# Altium PCB MainBoard_V2.PcbDoc
Units mil, origin at the board's own origin, x right, y up, seen from the top; angles counter-clockwise.
Board outline 3937.01 x 5118.11 mil, 2 copper layers (Top Layer, Bottom Layer); 82 components, 86 nets, 392 pads, 30 vias.
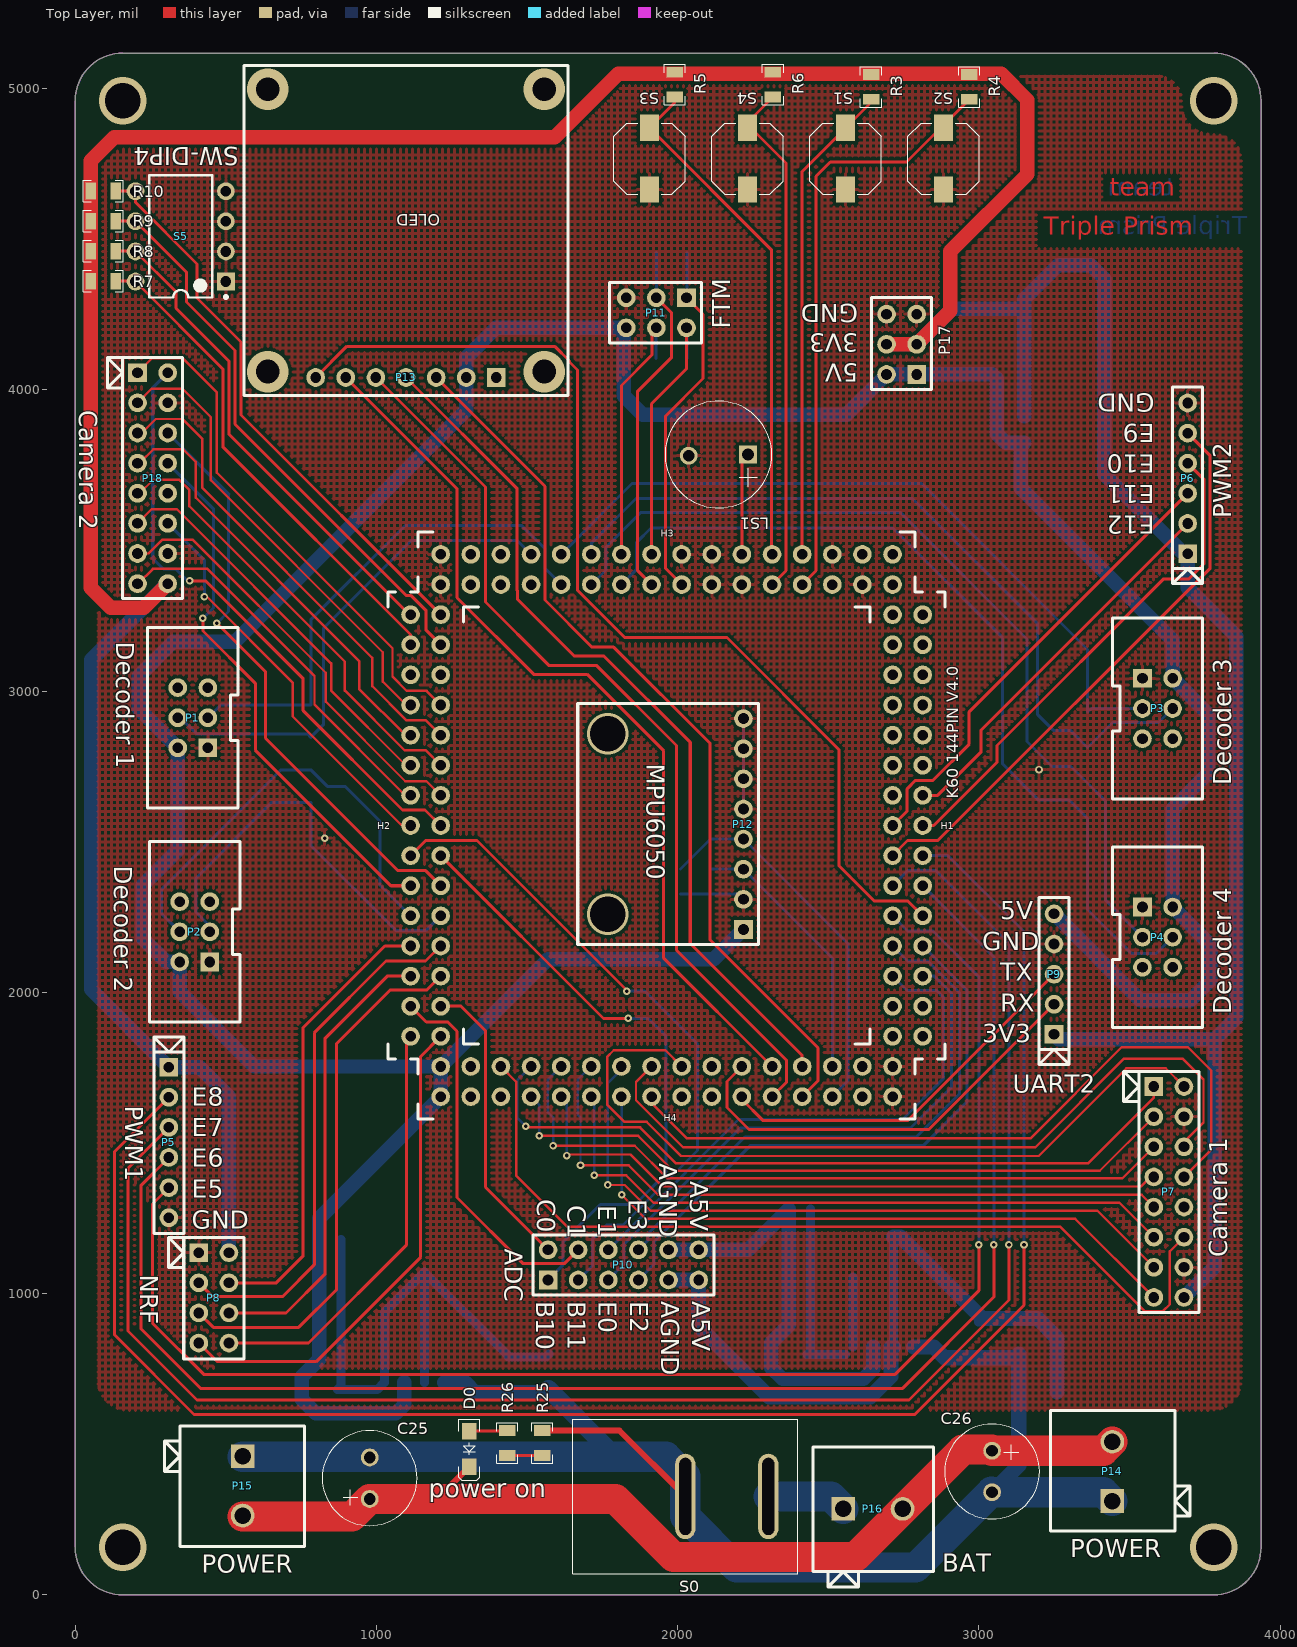
[diagram p0: Top Layer view]
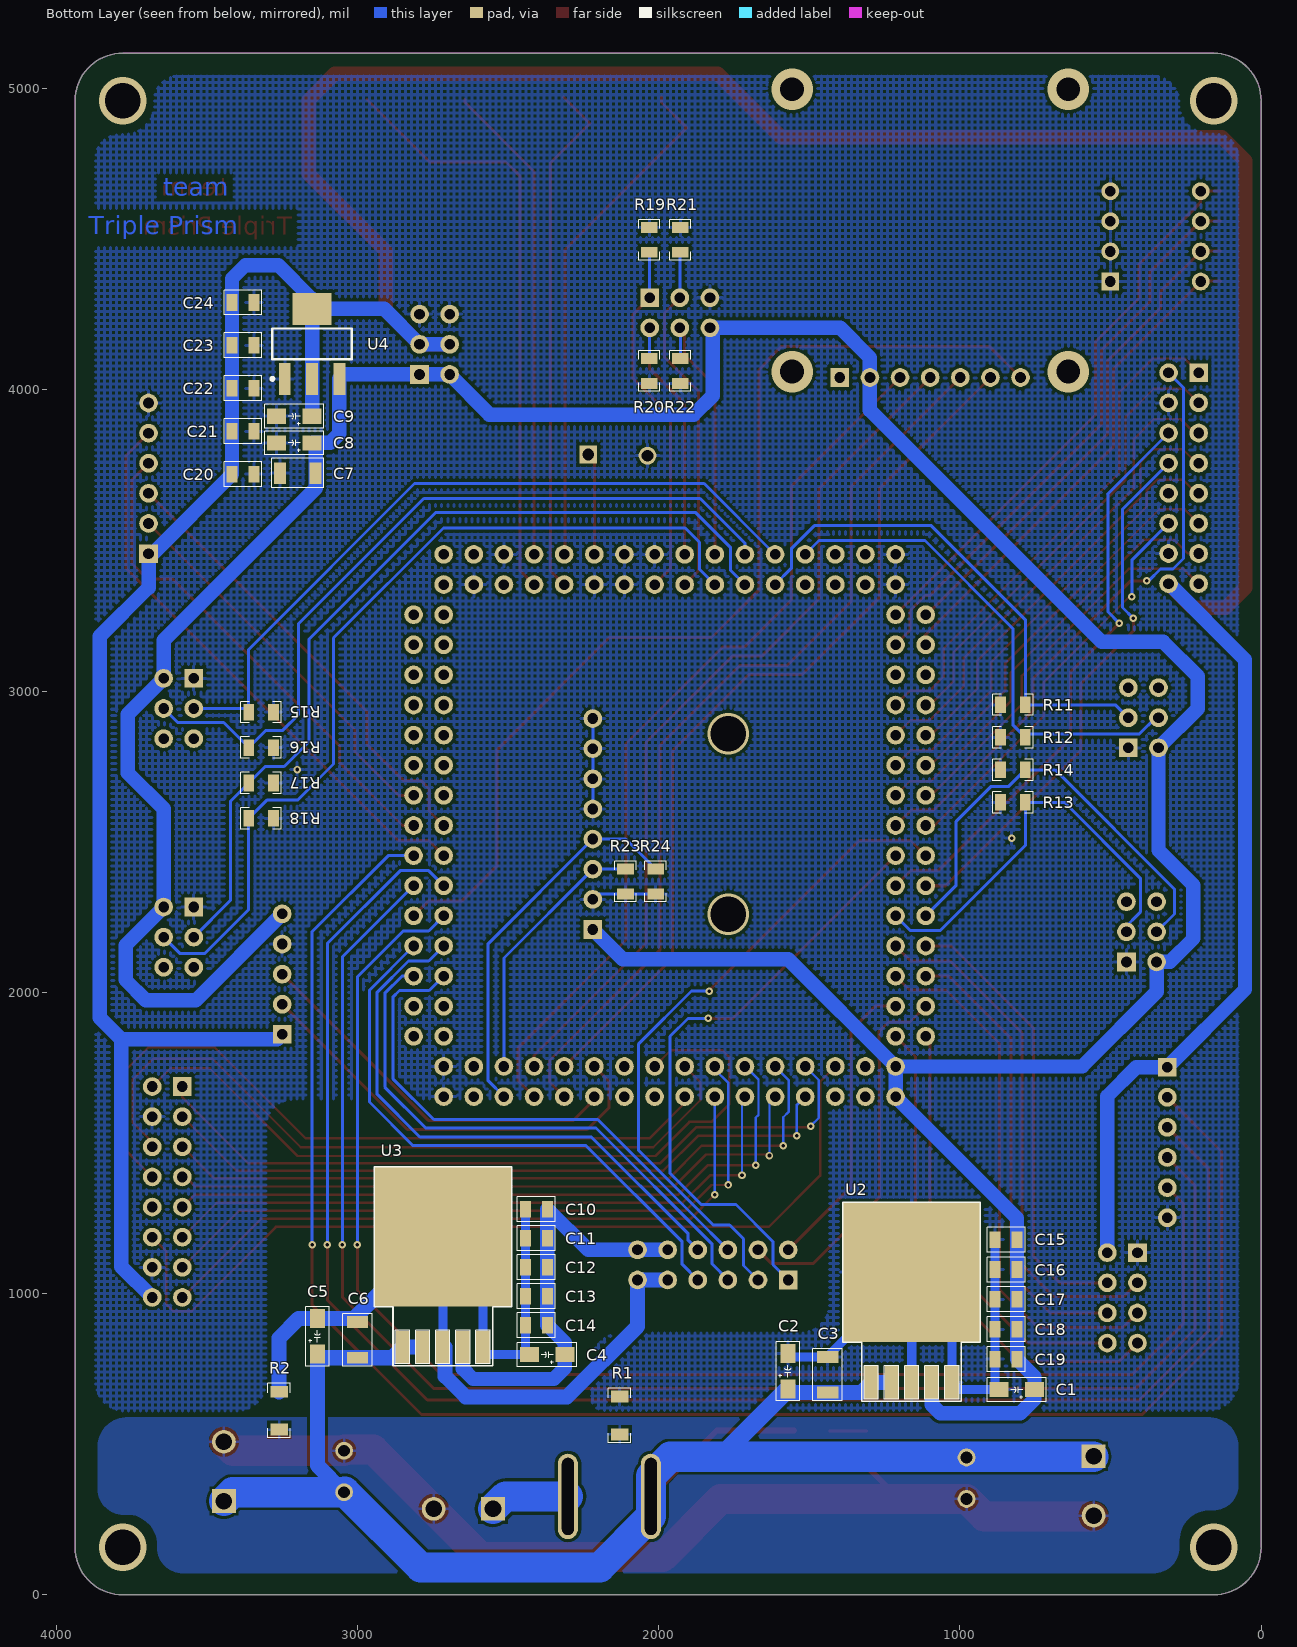
[diagram p1: Bottom Layer view, seen from below]

## Layer stack, top to bottom
Top Solder: solder mask 0.4, Solder Resist, Dk 3.5
Top Layer: signal copper 1.4
Dielectric 1: dielectric 12.6, FR-4, Dk 4.8
Bottom Layer: signal copper 1.4
Bottom Solder: solder mask 0.4, Solder Resist, Dk 3.5

## Board outline
157.48,0 cw(c157.48,157.48) 0,157.48 0,4960.63 cw(c157.48,4960.63) 157.48,5118.11 3779.53,5118.11 cw(c3779.53,4960.63) 3937.01,4960.63 3937.01,157.48 cw(c3779.53,157.48) 3779.53,0

## Design rules (kind name [scope] priority, off if disabled: settings)
Clearance [All] p1: gap=10
PolygonConnect [All] p1: connectstyle=Relief reliefconductorwidth=10 reliefentries=4 polygonreliefangle="90 Angle" airgapwidth=10
RoutingVias [All] p1: holewidth=28 width=50 viastyle="Through Hole" minholewidth=28 minwidth=50 maxholewidth=28 maxwidth=50
SolderMaskExpansion [All] p1: expansion=4
Width GDN [InNetClass('GND')] p1: maxlimit=100 minlimit=10 preferedwidth=48
Width Signal [InNetClass('Signal Nets')] p2: maxlimit=10 minlimit=6 preferedwidth=10
Width "Large Power Nets" [InNetClass('Large Power Nets')] p3: maxlimit=100 minlimit=20 preferedwidth=60
Width Power [InNetClass('Power')] p4: maxlimit=60 minlimit=20 preferedwidth=50
Width [All] p5: maxlimit=10 minlimit=10 preferedwidth=10
30 further rules are at their usual default settings.

## Classes and differential pairs
net class "Signal Nets": PTA4 PTA5 PTA6 PTA7 PTA8 PTA9 PTA10 PTA11 PTA12 PTA13 PTA24 PTA25 PTA26 PTA27 PTB0 PTB1 PTB2 PTB3 PTB4 PTB5 PTB6 PTB7 PTB8 PTB9 PTB10 PTB11 PTB16 PTB17 PTB18 PTB19 PTB20 PTB21 PTB22 PTB23 PTC0 PTC1 PTC2 PTC3 PTC6 PTC8 PTC9 PTC10 PTC11 PTC12 PTC13 PTC14 PTC15 PTC16 PTC17 PTC18 PTD2 PTD3 PTD4 PTD5 PTD6 PTD7 PTD8 PTD9 PTE0 PTE1 PTE2 PTE3 PTE4 PTE5 PTE6 PTE7 PTE8 PTE9 PTE10 PTE11 PTE12 PTE24 PTE25 PTE26 PTE27 PTE28
net class "Large Power Nets": 7V2 NetP16_1
net class Power: 3V3 5V A5V
net class GND: AGND GND PGND

## Components (designator, comment, footprint, x,y, rotation, side; value= is the part's Value field where it differs from the comment)
C1 "Cap Pol1" "1206 C tan" 811.24,681.1 r0 bottom
C2 "Cap Pol1" "1206 C tan" 1570.87,742.13 r90 bottom
C3 "Cap Semi" "1206 C" 1438.98,730.32 r270 bottom
C4 "Cap Pol1" "1206 C tan" 2370.08,797.24 r0 bottom
C5 "Cap Pol1" "1206 C tan" 3132.65,858.02 r90 bottom
C6 "Cap Semi" "1206 C" 2999.55,846.21 r270 bottom
C7 "Cap Semi" "1206 C" 3197.78,3723.79 r180 bottom
C8 "Cap Pol1" "1206 C tan" 3209.59,3824.18 r0 bottom
C9 "Cap Pol1" "1206 C tan" 3209.59,3912.77 r0 bottom
C10 "Cap" "0805 C" 2405.51,1280.27 r180 bottom
C11 "Cap" "0805 C" 2405.51,1184.05 r180 bottom
C12 "Cap" "0805 C" 2405.51,1087.84 r180 bottom
C13 "Cap" "0805 C" 2405.51,991.63 r180 bottom
C14 "Cap" "0805 C" 2405.51,895.42 r180 bottom
C15 "Cap" "0805 C" 846.67,1179.13 r180 bottom
C16 "Cap" "0805 C" 846.67,1079.92 r180 bottom
C17 "Cap" "0805 C" 846.67,980.71 r180 bottom
C18 "Cap" "0805 C" 846.67,881.5 r180 bottom
C19 "Cap" "0805 C" 846.67,782.28 r180 bottom
C20 "Cap" "0805 C" 3379.86,3720.25 r0 bottom
C21 "Cap" "0805 C" 3379.86,3862.77 r0 bottom
C22 "Cap" "0805 C" 3379.86,4005.29 r0 bottom
C23 "Cap" "0805 C" 3379.86,4147.81 r0 bottom
C24 "Cap" "0805 C" 3379.86,4290.33 r0 bottom
C25 "Cap Pol1" "C POL" 977.84,387.2 r90 top
C26 "Cap Pol1" "C POL" 3044.02,409.58 r270 top
D0 "LED" "0805 D" 1308.14,484.48 r270 top
"K60 144PIN V4.0" "U1" "K60 V4.0" 1968.5,2559.06 r0 top
LS1 "BEEP" BEEP 2135.36,3785.7 r180 top
P1 "Decoder 1" "BigHeader P3*2" 440.55,2811.81 r90 top
P2 "Decoder 2" "BigHeader P3*2" 446.85,2101.18 r90 top
P3 "Decoder 3" "BigHeader P3*2" 3543.31,3042.52 r270 top
P4 "Decoder 4" "BigHeader P3*2" 3543.31,2283.46 r270 top
P5 "PWM1" "Header P6" 311.22,1751.97 r270 top
P6 "PWM2" "Header P6" 3693.31,3456.69 r90 top
P7 "Camera 1" "FHeader P8*2" 3581.1,1687.4 r270 top
P8 "NRF" NRF 410.52,1136 r270 top
P9 "UART2" "Header P5" 3249.8,1860.63 r90 top
P10 "ADC" "HEADER P6*2" 1570.08,1045.28 r0 top
P11 "FTM" "HEADER P3*2" 2029.53,4306.1 r180 top
P12 "MPU6050" MPU6050 1968.5,2559.06 r90 top
P13 "OLED" "OLED P7" 1098.43,4041.34 r180 top
P14 "POWER" "CONNECT 050-2" 3443.14,311.39 r90 top
P15 "POWER" "CONNECT 050-2" 555.98,460.1 r270 top
P16 "BAT" "CONNECT 050-2" 2550,285.43 r0 top
P17 "5V_3.3V_GND" "HEADER P3*2" 2793.66,4051.48 r90 top
P18 "Camera 2" "FHeader P8*2" 207.09,4057.09 r270 top
R1 "Res2" "1206 R" 2129.2,595.64 r270 bottom
R2 "Res2" "1206 R" 3259.66,611.34 r90 bottom
R3 "Res2" "0805 R" 2642.28,5005.91 r90 top
R4 "Res2" "0805 R" 2968.18,5005.91 r90 top
R5 "Res2" "0805 R" 1990.49,5013.78 r90 top
R6 "Res2" "0805 R" 2316.38,5013.78 r90 top
R7 "Res2" "0805 R" 93.5,4361.22 r180 top
R8 "Res2" "0805 R" 93.5,4460.96 r180 top
R9 "Res2" "0805 R" 93.5,4560.7 r180 top
R10 "Res2" "0805 R" 93.5,4660.43 r180 top
R11 "Res2" "0805 R" 823.81,2954.72 r180 bottom
R12 "Res2" "0805 R" 823.81,2846.78 r180 bottom
R13 "Res2" "0805 R" 823.81,2630.91 r180 bottom
R14 "Res2" "0805 R" 823.81,2738.85 r180 bottom
R15 "Res2" "0805 R" 3319.61,2930.12 r0 bottom
R16 "Res2" "0805 R" 3319.61,2812.66 r0 bottom
R17 "Res2" "0805 R" 3319.61,2695.21 r0 bottom
R18 "Res2" "0805 R" 3319.61,2577.76 r0 bottom
R19 "Res2" "0805 R" 2031.06,4498.03 r270 bottom
R20 "Res2" "0805 R" 2031.06,4062.99 r270 bottom
R21 "Res2" "0805 R" 1927.99,4498.03 r270 bottom
R22 "Res2" "0805 R" 1927.99,4062.99 r270 bottom
R23 "Res2" "0805 R" 2110.13,2368.11 r90 bottom
R24 "Res2" "0805 R" 2009.84,2368.11 r90 bottom
R25 "Res2" "0805 R" 1550.72,504.22 r270 top
R26 "Res2" "0805 R" 1434.52,504.22 r90 top
S0 "SW-SPST" SWITCH 2025.59,326.77 r270 top
S1 "SW-PB" "Touch Switch" 2557.4,4768 r90 top
S2 "SW-PB" "Touch Switch" 2882.86,4768 r90 top
S3 "SW-PB" "Touch Switch" 1906.48,4768 r90 top
S4 "SW-PB" "Touch Switch" 2231.94,4768 r90 top
S5 "SW-DIP4" DIP-8 350.39,4509.84 r180 top
U2 "SPX29302" TO-263-5 1293.98,705.1 r180 bottom
U3 "SPX29302" TO-263-5 2850.4,822.97 r180 bottom
U4 "1117-3.3" SOT223_M 3150.53,4152.92 r0 bottom

## Footprints (in the part's own frame and the unit in brackets; to place one, negate y for a bottom-side part, rotate by r counter-clockwise, add the part's x,y. Pads: shape width x height; smd on the part's side, far side on the other; paste and mask are expansions set on the pad)
"0805 C" [mm]
  rect 0.95x1.4 smd: 1(-0.925,0) 2(0.925,0)
  silkscreen extent -1.6,-1.05 1.6,1.05, body extent -1,-0.63 1,0.63, height 0.6
"0805 D" [mm]
  rect 1.4x1.2 smd: 1(-1.5,0) 2(1.5,0)
  silkscreen extent -2.5,-0.87 2.62,0.87
"0805 R" [mm]
  rect 0.9x1.4 smd: 1(-1.05,0) 2(1.05,0)
  silkscreen extent -1.7,-0.9 1.7,0.9, body extent -1,-0.63 1,0.63, height 0.5
"1206 C" [mm]
  rect 1x1.8 smd: 1(-1.5,0) 2(1.5,0)
  silkscreen extent -2.2,-1.25 2.2,1.25, body extent -1.6,-0.8 1.6,0.8, height 0.8
"1206 C tan" [mm]
  rect 1.6x1.27 smd: 1(-1.5,0) 2(1.5,0)
  silkscreen extent -2.5,-1 2.5,1, body extent -1.6,-0.8 1.6,0.8, height 1.6
"1206 R" [mm]
  rect 1x1.5 smd: 1(-1.6,0) 2(1.6,0)
  silkscreen extent -2.3,-0.95 2.3,0.95, body extent -1.55,-0.8 1.55,0.8, height 0.55
BEEP [mm]
  rect 1.5x1.5 hole 1: 1(-2.5,0)
  round 1.5 hole 1: 2(2.5,0.1)
  silkscreen extent -4.5,-4.5 4.5,4.5, body extent -4.5,-4.5 4.5,4.5, height 6.02
"BigHeader P3*2" [mil]
  rect 62x62 hole 35.5: 1(0,0)
  round 62 hole 35.5: 2(0,100) 3(100,0) 4(100,100) 5(200,0) 6(200,100)
  silkscreen extent -200,-100 400,200, body extent -200,-103 400,203, height 354
"C POL" [mm]
  round 1.5 hole 1: 1(-1.75,0) 2(1.75,0)
  silkscreen extent -4,-4 4,4, body extent -4,-4 4,4, height 13.2
"CONNECT 050-2" [mm]
  rect 2x2 hole 1.4: 1(0,0)
  round 2 hole 1.4: 2(5,0)
  silkscreen extent -2.54,-6.57 7.62,5.2, body extent -2.42,-2.5 7.58,5.5, height 11
DIP-8 [mm] "DIP; 8 Leads; Row Spacing 7.62 mm; Pitch 2.54 mm"
  rect 1.5x1.5 hole 0.9: 1(-3.81,3.81)
  round 1.5 hole 0.9: 2(-3.81,1.27) 3(-3.81,-1.27) 4(-3.81,-3.81) 5(3.81,-3.81) 6(3.81,-1.27) 7(3.81,1.27) 8(3.81,3.81)
  silkscreen extent -3.94,-5.15 2.65,5.23, body extent -3.6,-5.15 3.6,5.15, height 5.08
"FHeader P8*2" [mil]
  rect 62x62 hole 35.5: 1(0,0)
  round 62 hole 35.5: 2(100,0) 3(200,0) 4(300,0) 5(400,0) 6(500,0) 7(600,0) 8(700,0) 9(700,100) 10(600,100) 11(500,100) 12(400,100) 13(300,100) 14(200,100) 15(100,100) 16(0,100)
  silkscreen extent -50,-100 750,150, body extent -50,-50 750,150, height 350
"HEADER P3*2" [mil]
  rect 62x62 hole 35.5: 1(0,0)
  round 62 hole 35.5: 2(0,100) 3(100,0) 4(100,100) 5(200,0) 6(200,100)
  silkscreen extent -50,-50 255,150, body extent -50,-50 250,150, height 350
"Header P5" [mil]
  rect 62x62 hole 35.5: 1(0,0)
  round 62 hole 35.5: 2(100,0) 3(200,0) 4(300,0) 5(400,0)
  silkscreen extent -100,-50 455,50, body extent -50,-50 450,50, height 350
"Header P6" [mil]
  rect 62x62 hole 35.5: 1(0,0)
  round 62 hole 35.5: 2(100,0) 3(200,0) 4(300,0) 5(400,0) 6(500,0)
  silkscreen extent -100,-50 553,50, body extent -50,-50 550,50, height 350
"HEADER P6*2" [mil]
  rect 62x62 hole 35.5: 1(0,0)
  round 62 hole 35.5: 2(0,100) 3(100,0) 4(100,100) 5(200,0) 6(200,100) 7(300,0) 8(300,100) 9(400,0) 10(400,100) 11(500,0) 12(500,100)
  silkscreen extent -50,-50 551,150, body extent -50,-50 550,150, height 350
"K60 V4.0" [mil]
  round 62 hole 35: 101(845,-705) 102(745,-705) 103(845,-605) 104(745,-605) 105(845,-505) 106(745,-505) 107(845,-405) 108(745,-405) 109(845,-305) 110(745,-305) 111(845,-205) 112(745,-205) 113(845,-105) 114(745,-105) 115(845,-5) 116(745,-5) 117(845,95) 118(745,95) 119(845,195) 120(745,195) 121(845,295) 122(745,295) 123(845,395) 124(745,395) 125(845,495) 126(745,495) 127(845,595) 128(745,595) 129(845,695) 130(745,695) 201(-755,-705) 202(-855,-705) 203(-755,-605) 204(-855,-605) 205(-755,-505) 206(-855,-505) 207(-755,-405) 208(-855,-405) 209(-755,-305) 210(-855,-305) 211(-755,-205) 212(-855,-205) 213(-755,-105) 214(-855,-105) 215(-755,-5) 216(-855,-5) 217(-755,95) 218(-855,95) 219(-755,195) 220(-855,195) 221(-755,295) 222(-855,295) 223(-755,395) 224(-855,395) 225(-755,495) 226(-855,495) 227(-755,595) 228(-855,595) 229(-755,695) 230(-855,695) 301(745,895) 302(745,795) 303(645,895) 304(645,795) 305(545,895) 306(545,795) 307(445,895) 308(445,795) 309(345,895) 310(345,795) 311(245,895) 312(245,795) 313(145,895) 314(145,795) 315(45,895) 316(45,795) 317(-55,895) 318(-55,795) 319(-155,895) 320(-155,795) 321(-255,895) 322(-255,795) 323(-355,895) 324(-355,795) 325(-455,895) 326(-455,795) 327(-555,895) 328(-555,795) 329(-655,895) 330(-655,795) 331(-755,895) 332(-755,795) 401(745,-805) 402(745,-905) 403(645,-805) 404(645,-905) 405(545,-805) 406(545,-905) 407(445,-805) 408(445,-905) 409(345,-805) 410(345,-905) 411(245,-805) 412(245,-905) 413(145,-805) 414(145,-905) 415(45,-805) 416(45,-905) 417(-55,-805) 418(-55,-905) 419(-155,-805) 420(-155,-905) 421(-255,-805) 422(-255,-905) 423(-355,-805) 424(-355,-905) 425(-455,-805) 426(-455,-905) 427(-555,-805) 428(-555,-905) 429(-655,-805) 430(-655,-905) 431(-755,-805) 432(-755,-905)
  silkscreen extent -930,-980 920,970, body extent -905,-955 895,945, height 350
MPU6050 [mil]
  rect 62x62 hole 35.5: 1(-350,-250)
  round 62 hole 35.5: 2(-250,-250) 3(-150,-250) 4(-50,-250) 5(50,-250) 6(150,-250) 7(250,-250) 8(350,-250)
  silkscreen extent -400,-300 400,300, body extent -400,-300 400,-200, height 350
NRF [mil]
  rect 62x62 hole 35.5: 1(0,0)
  round 62 hole 35.5: 2(100,0) 3(200,0) 4(300,0) 5(300,100) 6(200,100) 7(100,100) 8(0,100)
  silkscreen extent -50,-100 353,150, body extent -50,-50 350,150, height 350
"OLED P7" [mil]
  rect 62x62 hole 35.5: 1(-300,0)
  round 62 hole 35.5: 2(-200,0) 3(-100,0) 4(0,0) 5(100,0) 6(200,0) 7(300,0)
  silkscreen extent -537,-1035 537,59, body extent -350,-50 350,50, height 350
SOT223_M [mm]
  rect 1x2.7 smd: 1(2.3,2.95) 2(0,2.95) 3(-2.3,2.95)
  rect 3.3x2.7 smd: 4(0,-2.95)
  silkscreen extent -3.35,-1.3 3.48,3.07, body extent -3.35,-1.85 3.35,1.85, height 1.7
SWITCH [mm]
  oval 7.2x1.7 hole 1 slot 6.5 at 0 deg: 1(0,7) 2(0,0)
  silkscreen extent -6.5,-9.5 6.5,9.5, body extent -6.5,-9.5 6.5,9.5, height 15.5
TO-263-5 [mm]
  rect 1.203x2.803 smd: 1(0,0) 2(1.7,0) 3(3.4,0) 4(5.1,0) 5(6.8,0)
  rect 11.6x11.8 smd: 3(3.412,9.297)
  silkscreen extent -2.4,-1.6 9.2,15.2, body extent -1.65,-0.84 8.51,13.39, height 4.87
"Touch Switch" [mm]
  rect 2.2x1.6 smd: 1(-2.6,0) 2(2.6,0)
  silkscreen extent -3,-3 3,3, body extent -3.35,-3 3.35,3, height 5

## Part data
C1 C2 C4 C5 C8 C9 C25 C26: "Polarized Capacitor (Radial)"
C3 C6 C7: "Capacitor (Semiconductor SIM Model)"
C10 C11 C12 C13 C14 C15 C16 C17 C18 C19 C20 C21 C22 C23 C24: "Capacitor"
D0: library part LED0, "Typical INFRARED GaAs LED"
"K60 144PIN V4.0": library part "K60 144PIN V4.0系统板", "Vcc5V。网标x代表排针。USB5V供外接USB使用的，不推荐使用。VBAT是给另一个晶振使用的，使用3.3V，可以不接。"
LS1: library part Bell, "Electrical Bell"
P1 P2 P3 P4: library part Decoder, "Header-6"
P5 P6: library part "Header 6", "Header, 6-Pin"
P7 P18: library part OV7725, "3.3V"
P9: library part "Header 5", "Header, 5-Pin"
P10: library part "Header 6X2", "Header, 6-Pin, Dual row"
P11 P17: library part "Header 3X2", "Header, 3-Pin, Dual row"
P12: "Header-8"
P13: "Header-7"
P14 P15 P16: library part "Header 2", "Header, 2-Pin"
R1 R2 R3 R4 R5 R6 R7 R8 R9 R10 R11 R12 R13 R14 R15 R16 R17 R18 R19 R20 R21 R22 R23 R24 R25 R26: "Resistor"
S0: "Single-Pole, Single-Throw Switch"
S1 S2 S3 S4: "Switch"
S5: "DIP Switch"
U4: library part 1117

## Via types
v1: diameter 25, hole 12, Top Layer to Bottom Layer, 20 vias
v2: diameter 137.8, hole 78.74, Top Layer to Bottom Layer, 4 vias
v3: diameter 157.48, hole 118.11, Top Layer to Bottom Layer, 4 vias
v4: diameter 137.8, hole 118.1, Top Layer to Bottom Layer, 2 vias

## Nets (pads, with @x,y where several pads share a name; then routed paths per layer and width w, separated by ;. In a path a pad name is that pad's centre, name@x,y a point inside that pad or via, vN(x,y) a via of type N, cw(c..) or ccw(c..) an arc to the next point about the centre after c; other vN are vias at no path point)
3V3: C9.1 C20.2 C21.2 C22.2 C23.2 C24.2 P5.1 P6.1 P7.9 P8.8 P9.1 P17.3 P17.4 P18.9 R3.2 R4.2 R5.2 R6.2 R7.2 R8.2 R9.2 R10.2 U4.2 U4.4 | length 14047.6
  Top Layer w48: P18.9 227.56,3277.56 118.11,3277.56 52.17,3343.5 R7.2 R8.2 R9.2 R10.2 52.17,4760.83 129.92,4838.58 1592.52,4838.58 1803.15,5049.21 2968.18,5049.21 3074.8,5049.21 3161.42,4962.6 3161.42,4716.54 2905.22,4460.34 2905.22,4263.04 P17.3 P17.4
  Bottom Layer w48: P18.9@307.09,3358.27 53.36,3104.54 53.36,2009.83 P5.1 414.03,1751.97 510,1656 P8.8@510,1136 ; P17.4 P17.3 2911.25,4269.07 U4.4 ; C9.1 U4.2 U4.4 ; P9.1 3265.94,1844.49 3783.46,1844.49 ; P7.9 3783.46,1089.76 3783.46,1844.49 ; U4.4 3150.53,4302.1 3263.17,4414.74 3371.43,4414.74 3416.28,4369.89 C24.2 C23.2 C22.2 C21.2 C20.2 3679.84,3456.69 P6.1 3693.31,3344.09 3854.94,3182.46 3854.94,1915.96 3783.46,1844.49
5V: "K60 144PIN V4.0.431" "K60 144PIN V4.0.432" C1.1 C7.2 C8.1 C15.2 C16.2 C17.2 C18.2 C19.2 P1.2 P2.2 P3.2 P4.2 P9.5 P11.6 P12.1 P17.1 P17.2 U2.4 U4.3 | length 11989
  Bottom Layer w48: U2.4 1093.19,630.59 1064.96,602.36 799.21,602.36 752.19,649.39 C1.1 752.19,724.21 C19.2 C18.2 C17.2 C16.2 C15.2 810.26,1250.81 1213.5,1654.06 1213.5,1754.06 ; P12.1 2119.68,2110.24 1569.68,2110.24 1213.5,1754.06 ; P9.5 3536.02,1974.41 3702.76,1974.41 3769.69,2041.34 3769.69,2157.09 P4.2 3643.31,2609.84 3761.81,2728.35 3761.81,2924.02 P3.2 3643.31,3169.41 3138.72,3674 C7.2 3138.72,3812.37 C8.1 3089.94,3824.18 3059.98,3854.14 U4.3 3045.28,4051.48 P17.1 P17.2 2561.82,3919.64 2561.82,3917.1 1884.08,3917.1 1820.87,3980.31 1820.87,4197.44 P11.6 1397.05,4206.1 1298.43,4107.48 1298.43,3932.43 529.39,3163.39 324.8,3163.39 210.63,3049.21 210.63,2941.73 P1.2 340.55,2472.44 224.41,2356.3 224.41,2179.13 302.36,2101.18 P2.2 346.85,2001.57 594.37,1754.06 1213.5,1754.06
7V2: C2.1 C3.2 C5.1 C6.2 C25.2 C26.2 P14.1 P15.1 R25.1 S0.2 U2.1 U2.2 U3.1 U3.2 | length 5314.7
  Top Layer w20: R25.1 1806.8,545.56 S0.2
  Bottom Layer w50: 1226.38,458.66 1227.05,459.33 ; U2.2 U2.1 1327.82,671.26 C3.2 1559.06,671.26 C2.1 ; U3.2 U3.1 2886.21,787.16 C6.2 3120.84,787.16 C5.1 3132.65,429.31 C26.2
  Bottom Layer w60: C2.1 1784.32,469.62
  Bottom Layer w100: P15.1@555.98,458.66 1226.38,458.66 1961.34,458.66 S0.2@2025.59,394.41 ; S0.2@2025.59,381.59 S0.2 2025.59,260.33 2195.14,90.78 2790.24,90.78 C26.2@3042.1,342.64 ; C26.2 3413.85,340.68 P14.1
A5V: C4.1 C10.2 C11.2 C12.2 C13.2 C14.2 P10.10 P10.12 U3.4 | length 1446.2
  Bottom Layer w48: P10.10 P10.12 2234.1,1145.28 C10.2 C11.2 C12.2 C13.2 C14.2 2311.02,837.35 C4.1 2311.02,753.94 2348.43,716.54 2616.14,716.54 2649.61,750 U3.4
AGND: C4.2 C5.2 C6.1 C10.1 C11.1 C12.1 C13.1 C14.1 P10.9 P10.11 R2.2 U3.3 U3.5 | length 3180.2
  Bottom Layer w30: C4.2 2556.96,797.24 ; C4.2@2441.93,810.04 C14.1 C13.1 C12.1 C11.1 C10.1 ; U3.5 U3.3@2582.68,1055.57 ; U3.3@2716.54,822.97 U3.3@2716.54,1188.52 ; C6.1 C6.1@2999.55,905.51
  Bottom Layer w50: P10.9 P10.11 2070.08,891.28 2303.82,657.54 2640.58,657.54 2708.61,725.56 2708.61,822.97 U3.3@2716.54,822.97 ; U3.3@2716.54,1188.52 2739.92,1188.52 3011.36,917.08 C5.2 3195.72,917.08 3259.66,853.14 R2.2
GND: "K60 144PIN V4.0.304" "K60 144PIN V4.0.305" "K60 144PIN V4.0.312" "K60 144PIN V4.0.313" "K60 144PIN V4.0.314" "K60 144PIN V4.0.315" "K60 144PIN V4.0.331" "K60 144PIN V4.0.332" "K60 144PIN V4.0.401" "K60 144PIN V4.0.402" C1.2 C2.2 C3.1 C7.1 C8.2 C9.2 C15.1 C16.1 C17.1 C18.1 C19.1 C20.1 C21.1 C22.1 C23.1 C24.1 LS1.2 P1.1 P2.1 P3.1 P4.1 P5.6 P6.6 P7.10 P7.15 P8.1 P9.4 P11.5 P12.2 P12.5 P12.6 P12.7 P12.8 P17.5 P17.6 P18.10 P18.15 R1.1 R11.1 R12.1 R13.1 R14.1 R15.1 R16.1 R17.1 R18.1 R19.1 R20.2 R21.1 R22.2 R23.1 R24.1 S1.1 S2.1 S3.1 S4.1 S5.1 S5.2 S5.3 S5.4 U2.3 U2.5 U4.1 | length 2508.1
  Bottom Layer w10: R24.1 R23.1 2200.79,2326.77 P12.2 ; P12.5 P12.6 P12.7 P12.8
  Bottom Layer w30: C15.1 C16.1 C17.1 C18.1 C19.1 883.09,693.9 C1.2 1002.26,681.1 U2.5 1026.26,937.71 U2.3@1159.67,1071.11 ; U2.3@1160.12,705.1 1159.67,705.56 U2.3@1159.67,1071.11 ; C2.2@1572.83,799.21 1562.99,789.37 C3.1 1438.98,791.8 U2.3@1159.67,1071.11
  other v1: 828.12,2512 3199.76,2739.92
NetD0_1: D0.1 R26.2 | length 124.4
  Top Layer w10: D0.1 R26.2@1432.5,543.54
NetP16_1: P16.1 S0.1 | length 265.9
  Bottom Layer w100: S0.1 2508.66,326.77 P16.1
NetR25_2: R25.2 R26.1 | length 116.2
  Top Layer w10: R26.1 R25.2
PGND: C25.1 C26.1 D0.2 P14.2 P15.2 P16.2 R1.2 R2.1 | length 3303
  Top Layer w20: 1201.01,318.3 D0.2
  Top Layer w100: P15.2@555.98,260.1 919.64,260.1 C25.1 1201.01,318.3 1793.61,318.3 1986.88,125.04 2589.61,125.04 2946.62,482.06 C26.1@3044.02,482.06 ; C26.1 3413.38,478.48 P14.2
PTA4: "K60 144PIN V4.0.316" P11.1 R19.2 | length 1200
  Top Layer w10: 2013.5,3354.06 1959.92,3407.64 1959.92,3913.02 2084.65,4037.75 2084.65,4250.98 P11.1
  Bottom Layer w10: P11.1 2031.06,4307.64 R19.2
PTA5: "K60 144PIN V4.0.317" P11.2 R20.1 | length 902.5
  Top Layer w10: 1913.5,3454.06 1913.5,3954.12 2029.53,4070.15 P11.2
  Bottom Layer w10: P11.2 2031.06,4204.57 R20.1
PTA6: "K60 144PIN V4.0.318" P11.3 R21.2 | length 1191.4
  Top Layer w10: 1913.5,3354.06 1867.5,3400.06 1867.5,3995.68 1980.32,4108.49 1980.32,4255.31 P11.3
  Bottom Layer w10: R21.2@1929.31,4456.69 R21.2 1929.53,4455.16 P11.3
PTA7: "K60 144PIN V4.0.319" P11.4 R22.1 | length 902.5
  Top Layer w10: 1813.5,3454.06 1813.5,4015.02 1914.3,4115.81 1914.3,4190.87 P11.4
  Bottom Layer w10: R22.1 1927.99,4204.57 P11.4
PTA8: "K60 144PIN V4.0.320" P4.4 R18.2 | length 2989.9
  Bottom Layer w10: 1813.5,3354.06 1864,3404.55 1864,3494 1912,3542 2714,3542 3079,3177 3079,2758.16 3199.16,2638 3300.7,2638 R18.2 3360.95,2274.88 3505.91,2129.92 3589.76,2129.92 P4.4
PTA9: "K60 144PIN V4.0.321" P3.4 R16.2 | length 2602
  Bottom Layer w10: 1713.5,3454.06 1713.5,3491.5 1861.96,3639.96 2779.34,3639.96 3195.36,3223.94 3195.36,2922.12 3247.48,2870 3303.61,2870 R16.2 3443.95,2895.67 3596.46,2895.67 P3.4
PTA10: "K60 144PIN V4.0.322" P4.3 R17.2 | length 2948.8
  Bottom Layer w10: 1713.5,3354.06 1762,3402.55 1762,3478 1876.54,3592.54 2741.04,3592.54 3160,3173.58 3160,2833.1 3243.1,2750 3306.15,2750 R17.2 3421.26,2634.9 3421.26,2305.51 P4.3
PTA11: "K60 144PIN V4.0.323" P3.3 R15.2 | length 2468.9
  Bottom Layer w10: 1613.5,3454.06 1848.65,3689.2 2810.36,3689.2 3360.95,3138.61 R15.2 3373.35,2942.52 P3.3
PTA12: "K60 144PIN V4.0.324" P1.3 R11.2 | length 1721.7
  Bottom Layer w10: P1.3 482.28,2953.54 781.29,2953.54 R11.2 782.47,3237.11 1094.96,3549.6 1483.01,3549.6 1559.5,3473.11 1559.5,3408.06 1613.5,3354.06
PTA13: "K60 144PIN V4.0.325" P1.4 R12.2 | length 1676.8
  Bottom Layer w10: P1.4 350,2911.81 403.54,2858.27 770.99,2858.27 R12.2 824,2888.31 824,3208 1116.06,3500.06 1432.56,3500.06 1432.61,3500 1467.56,3500 1513.5,3454.06
PTA24: "K60 144PIN V4.0.229" R10.1 S5.5 | length 1891.4
  Top Layer w10: R10.1@134.96,4660.55 R10.1 199.8,4660.43 S5.5 200.39,4622.81 404.76,4418.45 404.76,4304.96 550.38,4159.34 550.38,3917.18 1213.5,3254.06
PTA25: "K60 144PIN V4.0.230" R8.1 S5.7 | length 1674.9
  Top Layer w10: R8.1@135.25,4460.55 R8.1 199.28,4460.96 S5.7 334.65,4325.59 334.65,4271.37 510.38,4095.64 510.38,3852.82 1101.38,3261.82 1113.5,3273.95 1113.5,3254.06
PTA26: "K60 144PIN V4.0.227" R9.1 S5.6 | length 1900.6
  Top Layer w10: R9.1 199.54,4560.7 S5.6 369.44,4390.8 369.44,4291.74 530.38,4130.8 530.38,3886.44 1099.64,3317.18 1115.43,3317.18 1165.35,3267.26 1165.35,3202.2 1213.5,3154.06
PTA27: "K60 144PIN V4.0.228" R7.1 S5.8 | length 1651.1
  Top Layer w10: R7.1@135.51,4360.55 R7.1 199.02,4361.22 S5.8 490.38,4069.86 490.38,3811.02 1113.5,3187.9 1113.5,3154.06
PTB0: "K60 144PIN V4.0.223" P18.1 | length 1713.9
  Top Layer w8: P18.1 254.33,4104.33 358.27,4104.33 470.64,3991.96 470.64,3725.16 1053.44,3142.36 1053.44,3048.26 1100.86,3000.84 1166.72,3000.84 1213.5,2954.06
PTB1: "K60 144PIN V4.0.224" P18.2 | length 1540.6
  Top Layer w8: P18.2 253.94,4003.94 356.3,4003.94 450.06,3910.18 450.06,3700.56 1021.18,3129.44 1021.18,3031.88 1099,2954.06 1113.5,2954.06
PTB2: "K60 144PIN V4.0.221" P18.3 | length 1610.7
  Top Layer w8: P18.3 221.26,3857.09 267.72,3903.54 356.3,3903.54 422.4,3837.44 422.4,3674.48 986.52,3110.36 986.52,3016.7 1100.2,2903.02 1164.54,2903.02 1213.5,2854.06
PTB3: "K60 144PIN V4.0.222" P18.4 | length 1463.9
  Top Layer w8: P18.4 213.78,3757.09 259.84,3803.15 358.27,3803.15 400.32,3761.1 400.32,3642.52 942.76,3100.08 942.76,3007.5 1096.2,2854.06 1113.5,2854.06
  Top Layer w10: 1113.5,2854.06 1119.75,2860.3 1132.48,2860.3
PTB4: "K60 144PIN V4.0.219" P18.5 | length 1505.5
  Top Layer w8: P18.5 214.17,3657.09 259.17,3702.09 345.16,3702.09 379.2,3668.04 379.2,3613.86 895.34,3097.72 895.34,3002.08 1094.18,2803.24 1164.32,2803.24 1213.5,2754.06
PTB5: "K60 144PIN V4.0.220" P18.6 | length 1330.8
  Top Layer w8: P18.6 253.94,3603.94 338.18,3603.94 849.74,3092.38 849.74,3001.98 1097.66,2754.06 1113.5,2754.06
PTB6: "K60 144PIN V4.0.217" P18.7 | length 1432.5
  Top Layer w8: P18.7 243.45,3457.09 288.45,3502.09 390.83,3502.09 831.74,3061.18 831.74,2965.24 1095.94,2701.04 1166.52,2701.04 1213.5,2654.06
PTB7: "K60 144PIN V4.0.218" P18.8 | length 1294.1
  Top Layer w8: P18.8 209.15,3357.09 258.02,3405.96 439.32,3405.96 794.46,3050.82 794.46,2955.24 1095.64,2654.06 1113.5,2654.06
PTB8: "K60 144PIN V4.0.215" P18.16 | length 2022.6
  Top Layer w10: v1(379.68,3366.38) 432.5,3366.38 757.22,3041.66 757.22,2935.22 1086.64,2605.8 1161.76,2605.8 1213.5,2554.06
  Bottom Layer w10: P18.16 257.62,4007.62 257.62,3440.36 292.5,3405.48 333.98,3405.48 373.08,3366.38 v1(379.68,3366.38)
PTB9: "K60 144PIN V4.0.216" P18.11 | length 1358.9
  Top Layer w8: v1(429.3,3313.3) 437.38,3313.3 721.74,3028.94 721.74,2916.66 1084.34,2554.06 1113.5,2554.06
  Bottom Layer w10: P18.11 429.3,3434.87 v1(429.3,3313.3)
PTB10: "K60 144PIN V4.0.213" P10.1 | length 2035.6
  Top Layer w10: 1213.5,2454.06 1753.9,1913.66 v1(1835.54,1913.66)
  Bottom Layer w10: P10.1 1570.08,1046.08 1620,1096 1620,1172.64 1743.36,1296 1858.63,1296 1962,1399.37 1962,1854 1902.34,1913.66 v1(1835.54,1913.66)
PTB11: "K60 144PIN V4.0.214" P10.3 | length 2237.1
  Top Layer w10: 1113.5,2454.06 1163.53,2504.08 1333.92,2504.08 1833.58,2004.42 v1(1831.38,2004.42)
  Bottom Layer w10: P10.3 1718,1093.2 1718,1181.72 1764.28,1228 1818.91,1228 2066,1475.09 2066,1829.3 1890.88,2004.42 v1(1831.38,2004.42)
PTB16: "K60 144PIN V4.0.211" P18.14 | length 1964.7
  Top Layer w10: v1(470.64,3225.92) 632,3064.56 632,2844 1072,2404 1163.56,2404 1213.5,2354.06
  Bottom Layer w10: P18.14 510,3654.17 508.88,3653.05 508.88,3264.16 v1(470.64,3225.92)
PTB17: "K60 144PIN V4.0.212" P18.13 | length 1805.2
  Top Layer w10: v1(424.08,3242.16) 424.08,3199.96 598,3026.04 598,2804 1047.94,2354.06 1113.5,2354.06
  Bottom Layer w10: P18.13 460,3604.17 459.88,3604.05 459.88,3277.96 v1(424.08,3242.16)
PTB18: "K60 144PIN V4.0.209" P2.3 R13.2 | length 1401.9
  Bottom Layer w10: P2.3 456.5,2210.83 400.85,2266.47 400.85,2379.2 652.56,2630.91 R13.2 782.47,2487.53 1064,2206 1165.45,2206 1213.5,2254.06
PTB19: "K60 144PIN V4.0.210" P2.4 R14.2 | length 1481.5
  Bottom Layer w10: P2.4 287.4,2260.63 287.4,2342.52 683.73,2738.85 R14.2 837.32,2684 896,2684 1012,2568 1012,2355.56 1113.5,2254.06
PTB20: "K60 144PIN V4.0.207" P8.2 | length 1755.3
  Top Layer w10: P8.2 456.52,990 688,990 794,1096 794,1866 1032,2104 1163.45,2104 1213.5,2154.06
PTB21: "K60 144PIN V4.0.208" P8.7 | length 1510.1
  Top Layer w10: P8.7 668,1036 756,1124 756,1882 1028.06,2154.06 1113.5,2154.06
PTB22: "K60 144PIN V4.0.205" P8.3 | length 1783.9
  Top Layer w10: P8.3 458.52,888 742,888 868,1014 868,1830 1046,2008 1167.45,2008 1213.5,2054.06
PTB23: "K60 144PIN V4.0.206" P8.6 | length 1524.2
  Top Layer w10: P8.6 700,936 830,1066 830,1848 1036.06,2054.06 1113.5,2054.06
PTC0: "K60 144PIN V4.0.203" P10.2 | length 996
  Top Layer w10: 1213.5,1954.06 1280.98,1954.06 1362,1873.04 1362,1353.35 P10.2
PTC1: "K60 144PIN V4.0.204" P10.4 | length 1253.7
  Top Layer w10: 1113.5,1954.06 1165.72,1901.84 1237.06,1901.84 1268,1870.9 1268,1774.1 1267.5,1773.61 1267.5,1319.05 1487.28,1099.28 1624.08,1099.28 P10.4
PTC2: "K60 144PIN V4.0.201" P8.4 | length 1666.6
  Top Layer w10: P8.4 472.56,773.96 800,773.96 1146.86,1120.82 1146.86,1787.41 1213.5,1854.06
PTC3: "K60 144PIN V4.0.202" P8.5 | length 1422.4
  Top Layer w10: P8.5 774.4,836 1099.26,1160.86 1099.26,1839.81 1113.5,1854.06
PTC6: "K60 144PIN V4.0.427" P7.11 | length 2991.4
  Top Layer w8: 1413.5,1754.06 1464,1703.56 1464,1392 1634.6,1221.4 3270.6,1221.4 3550,942 3612,942 3634,964 3634,1140.3 P7.11
PTC8: "K60 144PIN V4.0.425" P7.1 | length 2491.6
  Top Layer w8: v1(1495.4,1556.12) 1499.52,1552 1875.54,1552 1995.12,1432.42 3362.48,1432.42 3581.1,1651.04 P7.1
  Bottom Layer w8: v1(1495.4,1556.12) 1468.5,1583.02 1468.5,1709.06 1513.5,1754.06
PTC9: "K60 144PIN V4.0.426" P7.2 | length 2304.3
  Top Layer w8: v1(1540.95,1523.56) 1869.4,1523.56 1985.14,1407.82 3401.52,1407.82 P7.2
  Bottom Layer w8: 1513.5,1654.06 1540.95,1626.6 v1(1540.95,1523.56)
PTC10: "K60 144PIN V4.0.423" P7.3 | length 2372.1
  Top Layer w8: v1(1586.51,1490.99) 1857.63,1490.99 1966.12,1382.5 3476.2,1382.5 P7.3
  Bottom Layer w8: v1(1586.51,1490.99) 1586.51,1585.53 1568.5,1603.54 1568.5,1709.06 1613.5,1754.06
PTC11: "K60 144PIN V4.0.424" P7.4 | length 2237.7
  Top Layer w8: v1(1632.06,1458.43) 1635.63,1462 1843.16,1462 1949.38,1355.78 3538.56,1355.78 3564.5,1381.72 3564.5,1404 P7.4
  Bottom Layer w8: 1613.5,1654.06 1632.06,1635.5 v1(1632.06,1458.43)
PTC12: "K60 144PIN V4.0.421" P7.5 | length 2312.3
  Top Layer w8: v1(1677.62,1425.87) 1837.61,1425.87 1935.82,1327.66 3540.84,1327.66 P7.5
  Bottom Layer w8: v1(1677.62,1425.87) 1677.62,1584.32 1668.5,1593.44 1668.5,1710.5 1712.06,1754.06 1713.5,1754.06
PTC13: "K60 144PIN V4.0.422" P7.6 | length 2208
  Top Layer w8: v1(1723.17,1393.31) 1724.14,1392.34 1829.46,1392.34 1920.16,1301.64 3466.86,1301.64 P7.6
  Bottom Layer w8: 1713.5,1654.06 1723.17,1644.39 v1(1723.17,1393.31)
PTC14: "K60 144PIN V4.0.419" P7.7 | length 2337.6
  Top Layer w8: v1(1768.73,1360.74) 1824.7,1360.74 1910.52,1274.92 3393.58,1274.92 P7.7
  Bottom Layer w8: v1(1768.73,1360.74) 1768.73,1635.19 1768.5,1635.42 1768.5,1699.5 1813.5,1744.5 1813.5,1754.06
PTC15: "K60 144PIN V4.0.420" P7.8 | length 2234.2
  Top Layer w8: v1(1814.28,1328.18) 1894.26,1248.2 3320.3,1248.2 P7.8
  Bottom Layer w8: 1813.5,1654.06 1814.28,1653.28 v1(1814.28,1328.18)
PTC16: "K60 144PIN V4.0.417" P7.14 | length 2489
  Top Layer w8: 1913.5,1754.06 1862,1702.55 1862,1641.92 2017.92,1486 3188,1486 3482,1780 3676.68,1780 3746,1710.68 3746,1568 3681.1,1503.1 P7.14 P7.14@3687.4,1487.4
PTC17: "K60 144PIN V4.0.418" P7.13 | length 2476.6
  Top Layer w8: 1913.5,1654.06 1913.5,1632.5 2030.82,1515.18 3171.38,1515.18 3474.12,1817.92 3694.08,1817.92 3772,1740 3772,1478.3 P7.13
PTC18: "K60 144PIN V4.0.415" P7.16 | length 2568.7
  Top Layer w8: 2013.5,1754.06 1959.56,1808 1788,1808 1766,1786 1766,1628 1824,1570 1897.67,1570 2010.85,1456.82 3198.82,1456.82 3490,1748 3620.5,1748 P7.16
PTD2: "K60 144PIN V4.0.411" P9.2 | length 1444.8
  Top Layer w10: 2213.5,1754.06 2164,1704.55 2164,1618 2237,1545 2834.17,1545 P9.2
PTD3: "K60 144PIN V4.0.412" P9.3 | length 1275.6
  Top Layer w10: 2213.5,1654.06 2213.5,1644.4 2282.54,1575.36 2764.53,1575.36 P9.3
PTD4: "K60 144PIN V4.0.409" | length 2977.7
  Top Layer w10: 898.43,4041.34 1267.5,3672.26 1267.5,3310.5 1522,3056 1700,3056 1954,2802 1954,2113.56 2313.5,1754.06
PTD5: "K60 144PIN V4.0.410" | length 3064.7
  Top Layer w10: 998.43,4041.34 1362,3677.76 1362,3296 1572,3086 1730,3086 1996,2820 1996,2140 2362,1774 2362,1702.55 2313.5,1654.06
PTD6: "K60 144PIN V4.0.407" | length 2889.4
  Top Layer w10: 1098.43,4041.34 1467.5,3672.26 1467.5,3334.51 1468,3334.01 1468,3306 1658,3116 1756,3116 2042,2830 2042,2162 2413.5,1790.5 2413.5,1754.06
PTD7: "K60 144PIN V4.0.408" | length 2976.3
  Top Layer w10: 1198.43,4041.34 1559.5,3680.26 1559.5,3302.5 1716,3146 1788,3146 2108,2826 2108,2174 2466,1816 2466,1706.55 2413.5,1654.06
PTD8: "K60 144PIN V4.0.405" P12.3 R23.2 | length 885.7
  Bottom Layer w10: R23.2 2218.11,2409.45 P12.3 2513.5,2114.06 2513.5,1754.06
PTD9: "K60 144PIN V4.0.406" P12.4 R24.2 | length 1270.6
  Bottom Layer w10: R24.2 2109.45,2509.06 P12.4 2566,2161.56 2566,1706.55 2513.5,1654.06
PTE0: "K60 144PIN V4.0.105" P10.5 | length 1874
  Bottom Layer w10: P10.5 1770.08,1046.08 1822,1098 1822,1164 2208,1550 2773.43,1550 2908.96,1685.53 2908.96,1997.32 2852.23,2054.06 2813.5,2054.06
PTE1: "K60 144PIN V4.0.106" P10.6 | length 1815.8
  Bottom Layer w10: P10.6 1802,1177.2 1854.4,1229.6 2202.52,1577.72 2746.3,1577.72 2882.2,1713.62 2882.2,1984.36 2860.56,2006 2761.56,2006 2713.5,2054.06
PTE2: "K60 144PIN V4.0.107" P10.7 | length 1957.4
  Bottom Layer w10: P10.7 1922,1097.2 1922,1172.42 2240.82,1491.24 2815.28,1491.24 2960,1635.96 2960,2007.56 2813.5,2154.06
PTE3: "K60 144PIN V4.0.108" P10.8 | length 1915
  Bottom Layer w10: P10.8 1902,1177.2 1902,1198.76 2223.32,1520.08 2792.64,1520.08 2935.72,1663.16 2935.72,1998.85 2830.57,2104 2763.56,2104 2713.5,2154.06
PTE4: "K60 144PIN V4.0.109" | length 3497.4
  Top Layer w10: 798.43,4041.34 902.01,4144.92 1591.84,4144.92 1640.98,4095.78 1640.98,4093.02 1667.5,4066.5 1667.5,3335 1824.51,3178 2164,3178 2536,2806 2536,2420 2652,2304 2763.56,2304 2813.5,2254.06
PTE5: "K60 144PIN V4.0.110" P5.5 | length 4813.2
  Top Layer w10: P5.5 256.92,1297.67 256.92,901.98 426.7,732.2 2722.22,732.2 3000,1009.98 v1(3000,1162.52)
  Bottom Layer w10: 2713.5,2254.06 2763.56,2204 2848,2204 3000,2052 v1(3000,1162.52)
PTE6: "K60 144PIN V4.0.111" P5.4 | length 5108.6
  Top Layer w10: P5.4 219.4,1360.15 219.4,882.26 415.94,685.72 2747.15,685.72 3050,988.57 v1(3050,1162.52)
  Bottom Layer w10: 2813.5,2354.06 3050,2117.56 v1(3050,1162.52)
PTE7: "K60 144PIN V4.0.112" P5.3 | length 5580.5
  Top Layer w10: P5.3 175.26,1416.01 175.26,875.64 404.28,646.62 2767.94,646.62 3100,978.68 v1(3100,1162.52)
  Bottom Layer w10: 2713.5,2354.06 2763.45,2404 2858,2404 3100,2162 v1(3100,1162.52)
PTE8: "K60 144PIN V4.0.113" P5.2 | length 5832.5
  Top Layer w10: P5.2 131.14,1471.89 131.14,862.38 394.48,599.04 2787.46,599.04 3150,961.58 v1@3150,1160.52 ; v1@3148,1162.52 v1@3150,1160.52 ; v1(3150,1162.52) v1@3150,1160.52 ; v1@3154.3,1156.22 v1@3150,1160.52
  Bottom Layer w10: 2813.5,2454.06 2897.94,2454.06 3150,2202 v1(3150,1162.52)
PTE9: "K60 144PIN V4.0.114" P6.5 | length 1929.3
  Top Layer w10: 2713.5,2454.06 2763.45,2504 2864,2504 3768,3408 3768,3782 P6.5
PTE10: "K60 144PIN V4.0.115" P6.4 | length 1683
  Top Layer w10: 2813.5,2554.06 2850.06,2554.06 3060,2764 3060,2820 3612,3372 3696,3372 3748,3424 3748,3702 P6.4
PTE11: "K60 144PIN V4.0.116" P6.3 | length 1542.3
  Top Layer w10: 2713.5,2554.06 2762,2602.55 2762,2676 2790,2704 2847.76,2704 2968,2824.24 2968,2931.39 P6.3
PTE12: "K60 144PIN V4.0.117" P6.2 | length 1319.1
  Top Layer w10: 2813.5,2676.89 2813.5,2654.06 2863.36,2654.06 3008,2798.7 3008,2871.39 P6.2
PTE24: "K60 144PIN V4.0.307" R3.1 S1.2 | length 1605.3
  Top Layer w10: 2413.5,3454.06 2413.5,4725.42 2642.28,4954.2 R3.1
PTE25: "K60 144PIN V4.0.308" R4.1 S2.2 | length 1988.6
  Top Layer w10: 2413.5,3354.06 2459.5,3400.06 2459.5,4709.08 2507.04,4756.62 2760.23,4756.62 R4.1
PTE26: "K60 144PIN V4.0.309" R5.1 S3.2 | length 1721.8
  Top Layer w10: R5.1 1990.49,4954.37 S3.2 2311.02,4465.82 2311.02,3456.54 2313.5,3454.06
PTE27: "K60 144PIN V4.0.310" R6.1 S4.2 | length 1728.2
  Top Layer w10: 2313.5,3354.06 2359.5,3400.06 2359.5,4753.36 2228.4,4884.46 R6.1
PTE28: "K60 144PIN V4.0.311" LS1.1 | length 340
  Top Layer w10: 2213.5,3454.06 2213.5,3765.42 LS1.1
pads on no net: "K60 144PIN V4.0.101" "K60 144PIN V4.0.102" "K60 144PIN V4.0.103" "K60 144PIN V4.0.104" "K60 144PIN V4.0.118" "K60 144PIN V4.0.119" "K60 144PIN V4.0.120" "K60 144PIN V4.0.121" "K60 144PIN V4.0.122" "K60 144PIN V4.0.123" "K60 144PIN V4.0.124" "K60 144PIN V4.0.125" "K60 144PIN V4.0.126" "K60 144PIN V4.0.127" "K60 144PIN V4.0.128" "K60 144PIN V4.0.129" "K60 144PIN V4.0.130" "K60 144PIN V4.0.225" "K60 144PIN V4.0.226" "K60 144PIN V4.0.301" "K60 144PIN V4.0.302" "K60 144PIN V4.0.303" "K60 144PIN V4.0.306" "K60 144PIN V4.0.326" "K60 144PIN V4.0.327" "K60 144PIN V4.0.328" "K60 144PIN V4.0.329" "K60 144PIN V4.0.330" "K60 144PIN V4.0.403" "K60 144PIN V4.0.404" "K60 144PIN V4.0.413" "K60 144PIN V4.0.414" "K60 144PIN V4.0.416" "K60 144PIN V4.0.428" "K60 144PIN V4.0.429" "K60 144PIN V4.0.430" P1.5 P1.6 P2.5 P2.6 P3.5 P3.6 P4.5 P4.6 P7.12 P13.1 P13.2 P13.3 P13.4 P13.5 P13.6 P13.7 P18.12
copper on no net:
  other v2: 639.76,4061.02 1557.09,4061.02 639.76,4998.03 1557.09,4998.03
  other v3: 157.48,157.48 3779.53,157.48 157.48,4960.63 3779.53,4960.63
  other v4: 1768.5,2259.06 1768.5,2859.06

## Polygon pours and split planes (outlines as drawn)
PGND on Bottom Layer "Top Layer-PGND Net" (solid, pour order 10): 76.24,400.06 76.24,362.24 ccw(c157.72,362.24) 157.72,280.76 171.2,280.76 cw(c171.2,180.76) 271.2,180.76 271.2,158.56 ccw(c358.5,158.56) 358.5,71.26 716.38,71.26 3579.5,71.26 ccw(c3579.5,155.64) 3663.88,155.64 3663.88,166.2 cw(c3763.88,166.2) 3763.88,266.2 3777.36,266.2 ccw(c3777.36,350.58) 3861.74,350.58 3861.74,382.6 3861.74,495 ccw(c3764.24,492.5) 3761.74,590 215.92,590 176.24,590 ccw(c173.74,492.5) 76.24,495 76.24,385.5
GND on Bottom Layer "Top Layer-GND Net" (hatched 90Degree grid 20 track 10, pour order 12): 76.24,728.84 76.24,712.46 ccw(c176.24,712.46) 176.24,612.46 2182.84,612.46 ccw(c2182.84,653.2) 2223.58,653.2 2223.58,740.48 2223.58,768.5 ccw(c2123.58,768.5) 2123.58,868.5 1583.44,868.5 1532.14,868.5 cw(c1532.14,968.5) 1432.14,968.5 1432.14,1584.28 cw(c1493.24,1584.28) 1493.24,1645.38 3215.78,1645.38 cw(c3215.78,1558.1) 3303.06,1558.1 3303.06,830.68 3303.06,710.6 ccw(c3403.06,710.6) 3403.06,610.6 3733.5,610.6 3769.82,610.6 ccw(c3769.82,710.6) 3869.82,710.6 3869.82,925.84 3869.82,4765.54 ccw(c3787.42,4765.54) 3787.42,4847.94 3773.74,4847.94 cw(c3773.74,4947.94) 3673.74,4947.94 3673.74,4959.44 ccw(c3590.66,4959.44) 3590.66,5042.52 399,5042.52 361.84,5042.52 ccw(c361.84,4952.88) 272.2,4952.88 272.2,4950.14 cw(c172.2,4950.14) 172.2,4850.14 154.16,4850.14 ccw(c154.16,4772.48) 76.5,4772.48 76.5,734.94
GND on Top Layer "Top Layer-GND Net" (hatched 90Degree grid 20 track 10, remove dead copper, pour order 14): 75.88,730.22 75.88,712.78 ccw(c175.88,712.78) 175.88,612.78 314.36,612.78 3771.68,612.78 ccw(c3771.68,712.78) 3871.68,712.78 3871.68,818.74 3871.68,4760.42 ccw(c3783.84,4760.42) 3783.84,4848.26 3773.52,4848.26 cw(c3773.52,4948.26) 3673.52,4948.26 3673.52,4958.58 ccw(c3590.08,4958.58) 3590.08,5042.02 3547.42,5042.02 365.42,5042.02 ccw(c365.42,4949.08) 272.48,4949.08 272.48,4948.9 cw(c172.48,4948.9) 172.48,4848.9 155.86,4848.9 ccw(c155.86,4768.82) 75.78,4768.82 75.78,731.04

## Keep-outs
Keep-Out Layer:
  the board outline again, w3.94

## Other copper
Top Layer:
  text "team" at 3434.08,4645.38 h60
  text "Triple Prism" at 3215.86,4514.44 h60
Bottom Layer:
  text "team" at 3645.04,4645.36 h60
  text "Triple Prism" at 3891.5,4517.34 h60

## Silkscreen, mask and mechanical layers (free items; w line width, h text height)
Top Overlay:
  text "GND" at 2600.5,4284.92 h60 r180
  text "3V3" at 2600.5,4186.24 h60 r180
  text "5V" at 2600.5,4087.56 h60 r180
  text "GND" at 3583.68,3987.04 h60 r180
  text "E9" at 3583.68,3885.95 h60 r180
  text "E10" at 3583.68,3784.86 h60 r180
  text "E11" at 3583.68,3683.77 h60 r180
  text "E12" at 3583.68,3582.68 h60 r180
  text "5V" at 3071.79,2242.13 h60
  text "GND" at 3011.81,2140.26 h60
  text "TX" at 3071.79,2038.39 h60
  text "RX" at 3071.79,1936.52 h60
  text "3V3" at 3011.81,1834.65 h60
  text "E8" at 387.8,1624.02 h60
  text "E7" at 387.8,1522.31 h60
  text "AGND" at 1939.76,1433.26 h60 r270
  text "E6" at 387.8,1420.6 h60
  text "A5V" at 2041.34,1373.28 h60 r270
  text "E5" at 387.8,1318.9 h60
  text "C0" at 1533.46,1313.3 h60 r270
  text "E3" at 1838.19,1313.3 h60 r270
  text "C1" at 1635.04,1293.31 h60 r270
  text "E1" at 1736.61,1293.31 h60 r270
  text "GND" at 387.8,1214.57 h60
  text "B10" at 1531.5,974.41 h60 r270
  text "B11" at 1635.04,974.41 h60 r270
  text "E0" at 1738.58,974.41 h60 r270
  text "E2" at 1842.13,974.41 h60 r270
  text "AGND" at 1945.67,974.41 h60 r270
  text "A5V" at 2049.21,974.41 h60 r270
  text "power on" at 1174.28,323.28 h60
Top Solder:
  rectangle: 3201.74,4479.44 3923.04,4589.76
  rectangle: 3416.82,4628.7 3659.74,4713.06
Bottom Solder:
  rectangle: 3203.58,4479.44 3922.12,4588.84
  rectangle: 3416.82,4627.78 3660.66,4712.14

## Text inside footprints (layer, text, board x,y; h text height)
"K60 144PIN V4.0": Top Overlay "H1" at 2873.5,2534.06 h39.37; Top Overlay "H4" at 1953.5,1564.06 h39.37; Top Overlay "H2" at 1003.5,2534.06 h39.37; Top Overlay "H3" at 1943.5,3504.06 h39.37